# EAGLE board cfmodule (EAGLE 7.2.0)
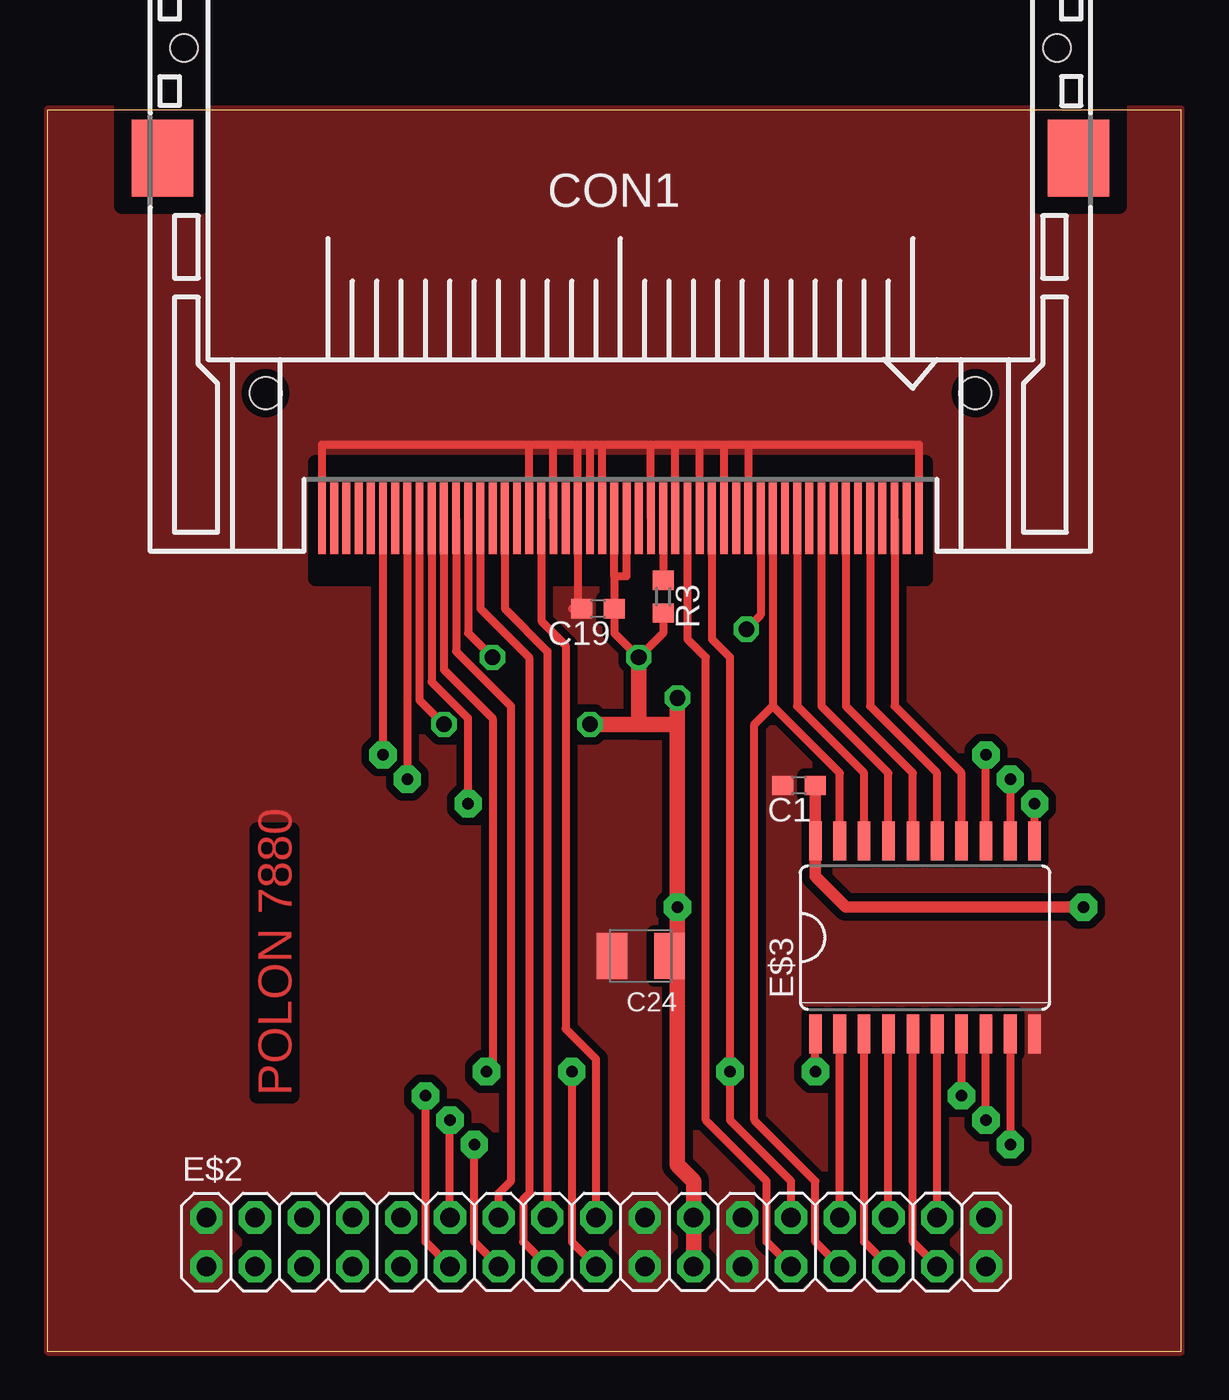
[diagram p0: board, top side]
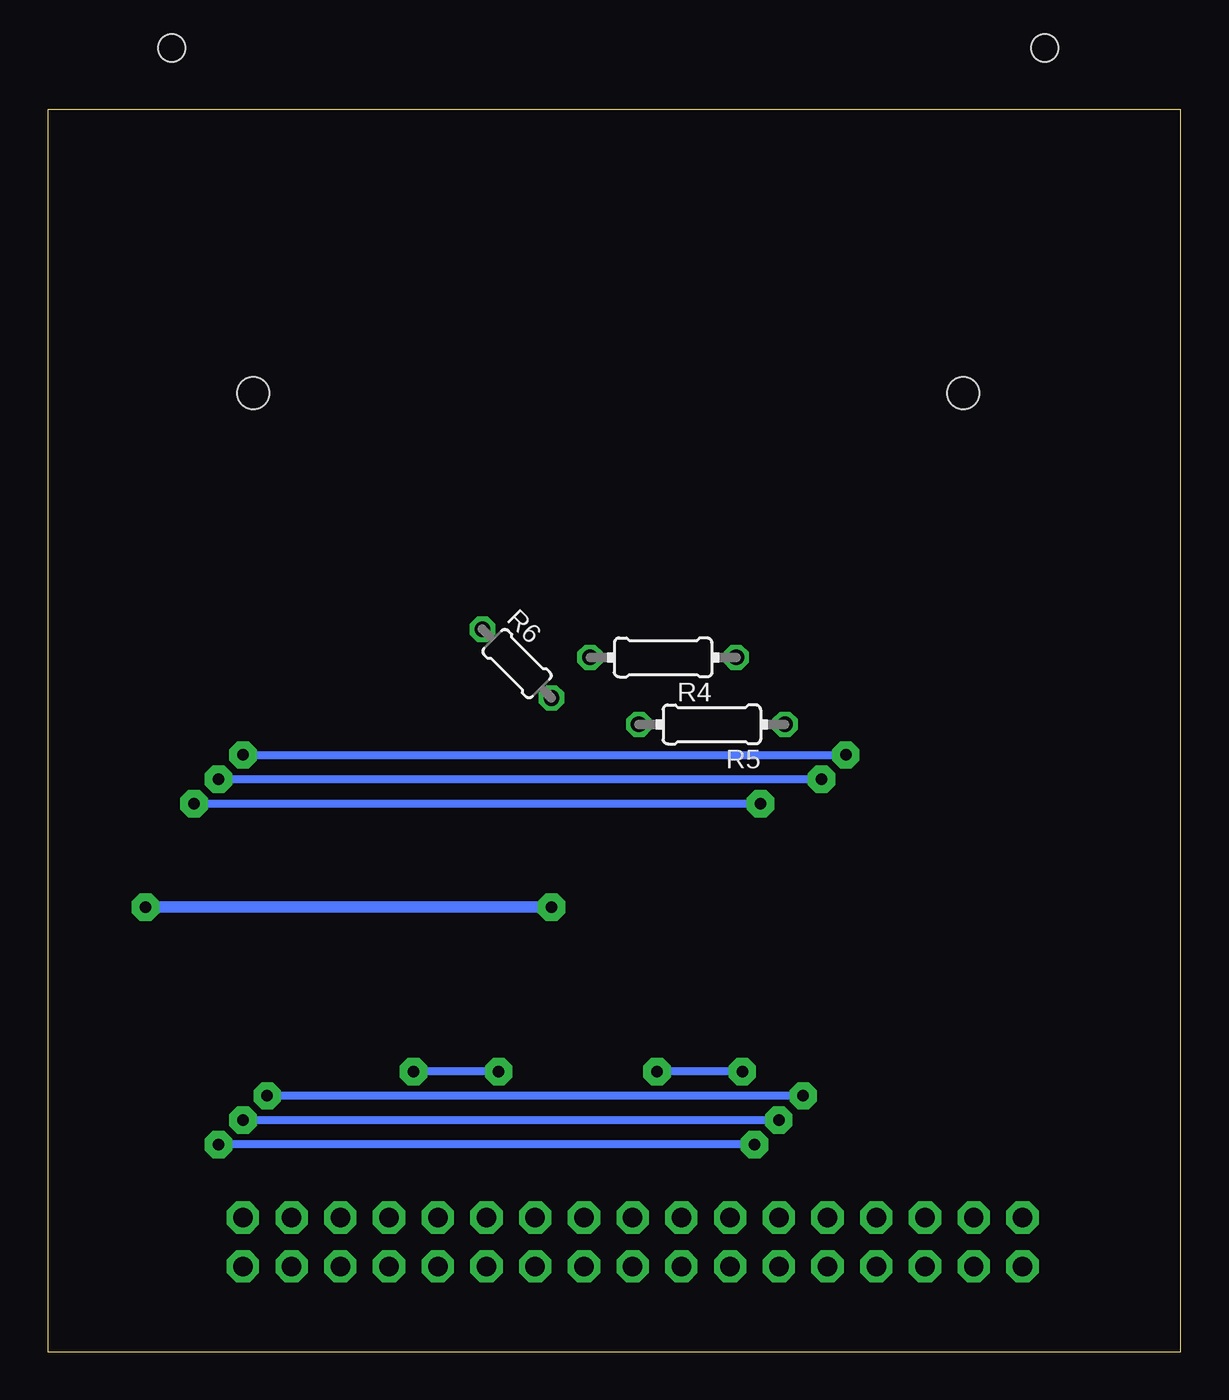
[diagram p1: board, bottom side, seen from below]

Size 59.05 x 64.77 mm. Coordinates in mm from the lower left corner, seen from the top.
Outline: 0,0 0,64.77 59.05,64.77 59.05,0 0,0
Copper layers (1*16): Top 0.035mm / dielectric 1.5mm / Bottom 0.035mm
Design rules "default *": minimum track width 10mil, minimum drill 24mil, track to track 8mil, track to pad 8mil, pad to pad 8mil, via to via 8mil, smd to smd 8mil, copper to edge 0mil, drill to drill 8mil, minimum pad ring 10mil, minimum via ring 8mil, stop-mask expansion 4mil, vias tented up to drill 0mil, thermal gap 10mil
tRestrict: area 14,40.3 to 45.7,46.4

## Footprints (pad centres in the part's own frame; a part is rotated, then mirrored left to right if it is on the bottom)
C0603 = smd 1.1 x 1: 1 -0.85,0; 2 0.85,0
SMC_B = smd 1.6 x 2.4: + -1.5,0; - 1.5,0
MI20-50PD-SF = smd 0.41 x 3.75: 1 15.557,-18.78; 2 14.287,-18.78; 3 13.018,-18.78; 4 11.748,-18.78; 5 10.477,-18.78; 6 9.207,-18.78; 7 7.938,-18.78; 8 6.668,-18.78; 9 5.397,-18.78; 10 4.128,-18.78; 11 2.857,-18.78; 12 1.587,-18.78; 13 0.318,-18.78; 14 -0.953,-18.78; 15 -2.223,-18.78; 16 -3.493,-18.78; 17 -4.763,-18.78; 18 -6.032,-18.78; 19 -7.303,-18.78; 20 -8.572,-18.78; 21 -9.842,-18.78; 22 -11.113,-18.78; 23 -12.383,-18.78; 24 -13.652,-18.78; 25 -14.922,-18.78; 26 14.922,-18.78; 27 13.652,-18.78; 28 12.383,-18.78; 29 11.113,-18.78; 30 9.842,-18.78; 31 8.572,-18.78; 32 7.303,-18.78; 33 6.032,-18.78; 34 4.763,-18.78; 35 3.493,-18.78; 36 2.223,-18.78; 37 0.953,-18.78; 38 -0.318,-18.78; 39 -1.587,-18.78; 40 -2.857,-18.78; 41 -4.128,-18.78; 42 -5.397,-18.78; 43 -6.668,-18.78; 44 -7.938,-18.78; 45 -9.207,-18.78; 46 -10.477,-18.78; 47 -11.748,-18.78; 48 -13.018,-18.78; 49 -14.287,-18.78; 50 -15.557,-18.78 | smd 3.2 x 4: M1 -23.883,-0.005; M2 23.883,-0.005 | hole 1.676: 18.5,-12.25; -18.5,-12.25 | hole 1.422: -22.75,5.75; 22.75,5.75
2X17 = drill 1.016 pad 1.676 octagon: 1 -20.32,-1.27; 2 -20.32,1.27; 3 -17.78,-1.27; 4 -17.78,1.27; 5 -15.24,-1.27; 6 -15.24,1.27; 7 -12.7,-1.27; 8 -12.7,1.27; 9 -10.16,-1.27; 10 -10.16,1.27; 11 -7.62,-1.27; 12 -7.62,1.27; 13 -5.08,-1.27; 14 -5.08,1.27; 15 -2.54,-1.27; 16 -2.54,1.27; 17 0,-1.27; 18 0,1.27; 19 2.54,-1.27; 20 2.54,1.27; 21 5.08,-1.27; 22 5.08,1.27; 23 7.62,-1.27; 24 7.62,1.27; 25 10.16,-1.27; 26 10.16,1.27; 27 12.7,-1.27; 28 12.7,1.27; 29 15.24,-1.27; 30 15.24,1.27; 31 17.78,-1.27; 32 17.78,1.27; 33 20.32,-1.27; 34 20.32,1.27
SO20W = smd 0.66 x 2.032: 1 -5.715,-5.029; 2 -4.445,-5.029; 3 -3.175,-5.029; 4 -1.905,-5.029; 5 -0.635,-5.029; 6 0.635,-5.029; 7 1.905,-5.029; 8 3.175,-5.029; 9 4.445,-5.029; 10 5.715,-5.029; 11 5.715,5.029; 12 4.445,5.029; 13 3.175,5.029; 14 1.905,5.029; 15 0.635,5.029; 16 -0.635,5.029; 17 -1.905,5.029; 18 -3.175,5.029; 19 -4.445,5.029; 20 -5.715,5.029
R0603 = smd 1 x 1.1: 1 -0.85,0; 2 0.85,0
0204/7 = drill 0.813 octagon: 1 -3.81,0; 2 3.81,0
0204/5 = drill 0.813 octagon: 1 -2.54,0; 2 2.54,0

## Placement (x,y rotation side)
C1  [C0603]  39.15,29.53 180 top
C19  [C0603]  28.68,38.73 180 top
C24  [SMC_B]  30.9,20.64 180 top
CON1  [MI20-50PD-SF]  29.84,62.23 0 top
E$2  [2X17]  28.57,5.71 0 top
E$3  [SO20W]  45.72,21.59 0 top
R3  [R0603]  32.07,39.37 270 top
R4  [0204/7]  26.99,36.2 180 bottom
R5  [0204/7]  24.45,32.7 180 bottom
R6  [0204/5]  34.61,35.88 315 bottom

## Library data of the parts
C1 C19 C24 R3-R6 = rcl
CON1 = con-hirose; OC_FARNELL: unknown; OC_NEWARK: unknown
E$2 = pinhead
E$3 = 74xx-eu

## Nets
A0: CON1.20 E$2.14
A1: CON1.19 E$2.15
A2: CON1.18 E$2.16
CF_CS0: CON1.7 E$2.27 E$3.19
D0: CON1.21 E$3.11
D1: CON1.22 E$3.12
D2: CON1.23 E$3.13
D3: CON1.2 E$3.14
D4: CON1.3 E$3.15
D5: CON1.4 E$3.16
D6: CON1.5 E$3.17
D7: CON1.6 E$3.18
GND: C1.2 C19.2 C24.- CON1.1 CON1.8 CON1.9 CON1.10 CON1.11 CON1.12 CON1.14 CON1.15 CON1.16 CON1.17 CON1.39 CON1.50 E$2.1 E$2.2 E$2.19 E$2.20 E$2.23 E$2.24 E$2.33 E$2.34 E$3.10
IO_RD: CON1.34 E$2.26 E$3.1
IO_WR: CON1.35 E$2.25
N$4: CON1.36 R3.1
N$19: CON1.44 R4.1
N$21: CON1.46 R5.1
N$29: CON1.32 R6.1
RST: CON1.41 E$2.18
S$1: E$2.30 E$3.4
S$2: E$2.28 E$3.2
S$8: E$2.13 E$3.9
S$9: CON1.45 E$2.17
S$11: E$2.29 E$3.3
S$12: E$2.31 E$3.5
S$13: E$2.32 E$3.6
S$15: E$2.12 E$3.8
S$16: E$2.11 E$3.7
VCC: C1.1 C19.1 C24.+ CON1.13 CON1.38 E$2.21 E$2.22 E$3.20 R3.2 R4.2 R5.2 R6.2

## Tracks (layer width: path | path; a pad name or v marks a point on that pad's centre or on a via)
A0
  Top 0.406: CON1.20 21.27,36.51 24.13,33.66 24.13,8.89 23.5,8.26 E$2.14
A1
  Top 0.406: CON1.19 22.54,38.73 25.08,36.2 25.08,8.26 24.77,7.94 24.77,5.71 E$2.15
A2
  Top 0.406: CON1.18 23.81,38.73 26.04,36.51 E$2.16
CF_CS0
  Top 0.406: E$2.27 40.01,5.71 40.01,8.89 36.83,12.06 36.83,32.7 37.78,33.66 | E$3.19 41.27,30.16 37.78,33.66 | CON1.7 37.78,33.66
D0  (via drill 0.6 pad 1.42)
  Top 0.406: CON1.21 20,34.92 21.91,33.02 v21.91,28.58 | E$3.11 v51.44,28.58
  Bottom 0.406: v51.44,28.58 v21.91,28.58
D1  (via drill 0.6 pad 1.42)
  Top 0.406: CON1.22 v18.73,29.85 | v50.16,29.85 E$3.12
  Bottom 0.406: v18.73,29.85 v50.16,29.85
D2  (via drill 0.6 pad 1.42)
  Top 0.406: CON1.23 v17.46,31.12 | E$3.13 v48.9,31.12
  Bottom 0.406: v48.9,31.12 v17.46,31.12
D3
  Top 0.406: CON1.2 44.13,33.66 47.62,30.16 E$3.14
D4
  Top 0.406: CON1.3 42.86,33.66 46.35,30.16 E$3.15
D5
  Top 0.406: CON1.4 41.59,33.66 45.09,30.16 E$3.16
D6
  Top 0.406: CON1.5 40.32,33.66 43.81,30.16 E$3.17
D7
  Top 0.406: CON1.6 39.05,33.66 42.55,30.16 E$3.18
GND
  Top 0.406: CON1.50 14.29,47.31 25.08,47.31 | 25.08,47.31 26.35,47.31 | 26.35,47.31 27.62,47.31 | 28.89,47.31 31.43,47.31 | 31.43,47.31 32.7,47.31 | 32.7,47.31 33.97,47.31 | 33.97,47.31 35.24,47.31 | 35.24,47.31 36.51,47.31 | 36.51,47.31 CON1.8 | CON1.9 35.24,47.31 | CON1.10 33.97,47.31 | CON1.11 32.7,47.31 | CON1.12 31.43,47.31 | CON1.14 28.89,47.31 | CON1.39 28.26,47.31 | 28.26,47.31 28.89,47.31 | 27.62,47.31 CON1.15 27.62,38.73 27.3,38.73 | 27.62,47.31 28.26,47.31 | CON1.16 26.35,47.31 | CON1.17 25.08,47.31 | 36.51,47.31 45.4,47.31 CON1.1
  pour Top (isolate 0.406, no thermals): 0,64.77 0,0 59.05,0 59.05,64.77
IO_RD  (via drill 0.6 pad 1.42)
  Top 0.406: CON1.34 34.61,37.15 35.56,36.2 v35.56,14.61 35.56,12.06 38.73,8.89 E$2.26 | v40.01,14.61 E$3.1
  Bottom 0.406: v35.56,14.61 v40.01,14.61
IO_WR
  Top 0.406: CON1.35 33.34,37.15 34.29,36.2 34.29,12.06 37.47,8.89 37.47,5.71 E$2.25
N$4
  Top 0.406: CON1.36 R3.1
N$19
  Top 0.406: CON1.44 21.91,37.46 R4.1
N$21
  Top 0.406: CON1.46 19.37,33.97 R5.1
N$29
  Top 0.406: CON1.32 37.15,38.42 R6.1
RST
  Top 0.406: CON1.41 25.72,38.1 26.99,36.83 26.99,16.83 28.57,15.24 E$2.18
S$1
  Top 0.406: E$2.30 E$3.4
S$2
  Top 0.406: E$2.28 E$3.2
S$8  (via drill 0.6 pad 1.42)
  Top 0.406: E$2.13 22.23,5.71 v22.23,10.79 | E$3.9 v50.16,10.79
  Bottom 0.406: v22.23,10.79 v50.16,10.79
S$9  (via drill 0.6 pad 1.42)
  Top 0.406: CON1.45 20.64,35.56 23.18,33.02 23.18,14.92 v22.86,14.61 | v27.3,14.61 27.3,5.71 E$2.17
  Bottom 0.406: v22.86,14.61 v27.3,14.61
S$11
  Top 0.406: E$2.29 42.55,5.71 E$3.3
S$12
  Top 0.406: E$2.31 45.09,5.71 E$3.5
S$13
  Top 0.406: E$2.32 E$3.6
S$15  (via drill 0.6 pad 1.42)
  Top 0.406: E$2.12 v20.95,12.06 | v48.9,12.06 E$3.8
  Bottom 0.406: v20.95,12.06 v48.9,12.06
S$16  (via drill 0.6 pad 1.42)
  Top 0.406: E$2.11 19.68,5.71 v19.68,13.33 | v47.62,13.33 E$3.7
  Bottom 0.406: v19.68,13.33 v47.62,13.33
VCC  (via drill 0.6 pad 1.42)
  Top 0.406: CON1.13 30.16,40.42 29.53,40.42 | 29.53,40.42 CON1.38 | 29.53,40.42 29.53,39.05 C19.1 29.53,37.47 R4.2 32.07,37.46 R3.2 | C24.+ 32.49,20.64 32.81,20.96
  Top 0.61: C1.1 E$3.20 40.01,24.77 41.59,23.18 v53.98,23.18
  Top 0.813: E$2.21 E$2.22 33.66,8.89 32.81,9.73 32.81,20.96 v32.81,23.18 32.81,32.7 | 30.8,32.7 R5.2 | R4.2 30.8,32.7 | 30.8,32.7 32.81,32.7 | 32.81,32.7 R6.2
  Bottom 0.61: v32.81,23.18 v53.98,23.18

## Text on the board
Top: POLON 7880